# Altium PCB LedDimming_V2_SMD_Only_Horizontal.PcbDoc
Units mm, origin at the board's own origin, x right, y up, seen from the top; angles counter-clockwise.
Board outline 50.04 x 10.16 mm, 2 copper layers (Top Layer, Bottom Layer); 25 components, 20 nets, 63 pads, 14 vias.
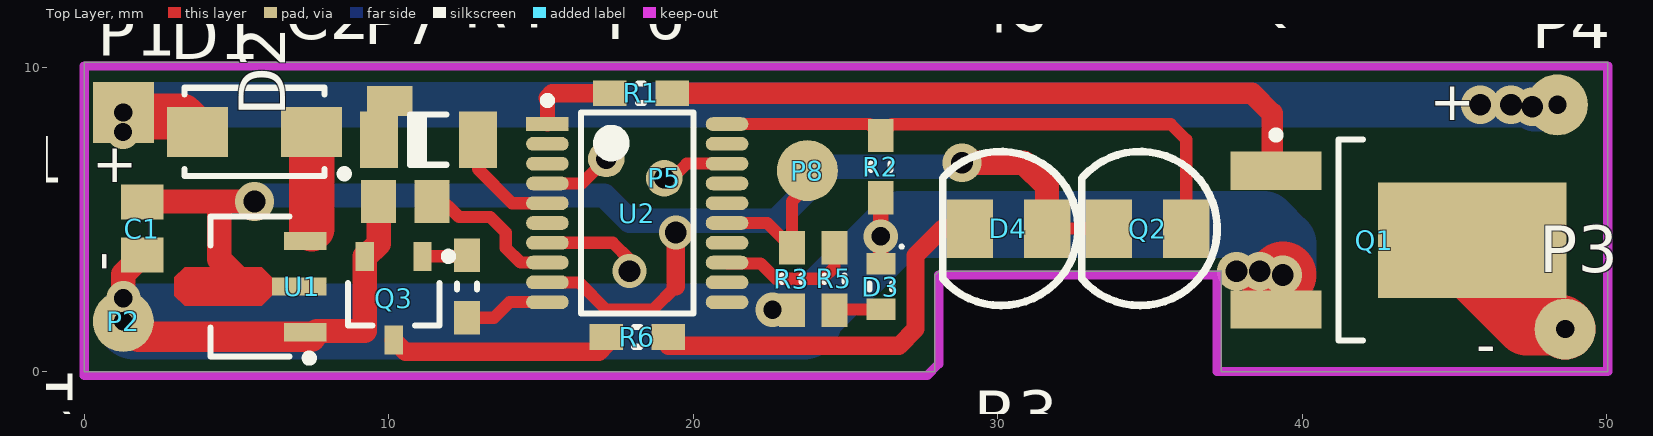
[diagram p0: Top Layer view]
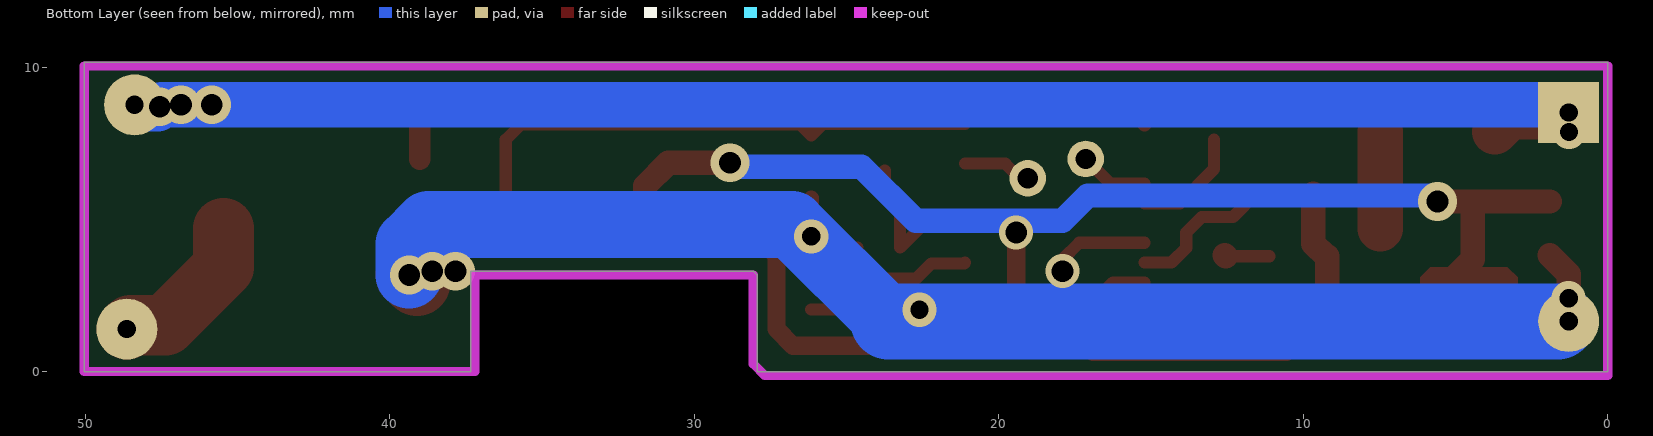
[diagram p1: Bottom Layer view, seen from below]

## Layer stack, top to bottom
Top Solder: solder mask 0.0102, Solder Resist, Dk 3.5
Top Layer: signal copper 0.0356
Dielectric 1: dielectric 0.32, FR-4, Dk 4.8
Bottom Layer: signal copper 0.0356
Bottom Solder: solder mask 0.0102, Solder Resist, Dk 3.5

## Board outline
0,0 27.94,0 27.94,3.175 28.067,3.302 37.338,3.302 37.338,0 50.038,0 50.038,10.16 0,10.16

## Design rules (kind name [scope] priority, off if disabled: settings)
Clearance [All] p1: gap=0.2 ignorepadtopadclearanceinfootprint=FALSE
PolygonConnect [All] p1: connectstyle=Relief reliefconductorwidth=0.254 reliefentries=4 polygonreliefangle="90 Angle" airgapwidth=0.254
RoomDefinition LedDimming [InComponentClass('LedDimming')] p1: confinementstyle=ConfineIn formatcopy=TRUE lockcomponents=FALSE outline -50.8,-76.2 0,-76.2 0,-50.8 -50.8,-50.8
RoutingVias [All] p1: holewidth=0.4 width=8 viastyle="Through Hole" minholewidth=0.711 minwidth=1.27 maxholewidth=0.711 maxwidth=1.27
SolderMaskExpansion [All] p1: expansion=0.102
Width [All] p1: maxlimit=4 minlimit=0.4 preferedwidth=0.5
30 further rules are at their usual default settings.

## Components (designator, comment, footprint, x,y, rotation, side; value= is the part's Value field where it differs from the comment)
C1 "106" CAPC2012X12N 1.905,4.699 r90 top
C2 "104" CAPC2012X12N 10.541,5.588 r0 top
D1 "1N4007" SODFL504X244-2N 5.588,7.874 r180 top
D2 "1N4148" DIOMELF3515N 11.303,7.62 r0 top
D3 "LED0603" DIOC1608X06N 26.162,2.794 r270 top
D4 "LED IR 3mm-SMD" LED_IR_3mm-SMD 31.623,4.699 r180 top
P1 "P" Point#1 1.281,8.509 r0 top
P2 "P" Point#2 1.281,1.651 r0 top
P3 "P" Point#2 48.641,1.397 r0 top
P4 "P" Point#2 48.387,8.763 r0 top
P5 "P" Point#3 19.05,6.35 r0 top
P6 "P" Point#3 17.145,6.985 r0 top
P7 "P" Point#4 10.033,8.89 r0 top
P8 "P" Point#5 23.749,6.604 r0 top
Q1 "AOD424" DPAK228P991X229-3N_TO252 43.243,4.318 r0 top
Q2 "LED IR 3mm-SMD" LED_IR_3mm-SMD 36.195,4.699 r180 top
Q3 "C1815" SOT95P278X125-3N 10.16,2.413 r270 top
R1 "470R" RESC2608X06N_0603 18.288,9.144 r180 top
R2 "10K" RESC2608X06N_0603 26.162,6.731 r90 top
R3 "10K" RESC2608X06N_0603 23.241,3.048 r90 top
R4 "1K" RESC2608X06N_0603 12.573,2.794 r90 top
R5 "1K" RESC2608X06N_0603 24.638,3.048 r90 top
R6 "330R" RESC2608X06N_0603 18.161,1.143 r0 top
U1 "CJA1117B-5.0 SOT89" SOT89-150P409X160-3N 5.461,2.794 r180 top
U2 "STM8S003" TSOP65P640X120-20N 18.161,5.207 r0 top value=STM8S003F3

## Footprints (in the part's own frame and the unit in brackets; to place one, negate y for a bottom-side part, rotate by r counter-clockwise, add the part's x,y. Pads: shape width x height; smd on the part's side, far side on the other; paste and mask are expansions set on the pad)
CAPC2012X12N [mm] "Chip Capacitor, 2-Leads, Body 2.00x1.25mm, IPC Medium Density"
  rect 1.15x1.4 smd: 1(-0.875,0) 2(0.875,0)
  body extent -1.1,-0.67 1.1,0.67, height 1.2
DIOC1608X06N [mm] "Chip Diode, 2-Leads, Body 1.60x0.80mm, IPC Medium Density"
  rect 0.7x0.95 smd: 1(-0.75,0) 2(0.75,0)
  silkscreen extent -1.36,-0.38 0.1,0.74, body extent -0.9,-0.4 0.9,0.4, height 0.6
DIOMELF3515N [mm] "MELF Diode, 2-Leads, Body 3.50x1.55mm, IPC Medium Density"
  rect 1.25x1.85 smd: 1(-1.625,0) 2(1.625,0)
  silkscreen extent -0.6,-0.83 0.6,0.82, body extent -1.85,-0.85 1.85,0.85, height 1.69
DPAK228P991X229-3N_TO252 [mm] "D-PAK, 3-Pads, Body 6.15x6.65mm (max), IPC Medium Density"
  rect 3x1.25 smd: 1(-4.1,2.28) 3(-4.1,-2.28)
  rect 6.2x3.8 smd: 4(2.35,0)
  silkscreen extent -4.22,-3.3 -1.25,3.58, body extent -2.05,-3.3 4.05,3.3, height 2.29
LED_IR_3mm-SMD [mil] "IR Transmitter and Receiver Led"
  rect 60x75.75 smd: 1(100,0) 2(0,0)
  silkscreen extent -40,-100 135,100
Point#1 [mm]
  rect 2x2 hole 0.6: 1(0,0)
Point#2 [mm]
  round 2 hole 0.6: 1(0,0)
Point#3 [mm]
  round 1.2 hole 0.67: 1(0,0)
Point#4 [mm]
  rect 1.5x1 smd: 1(0,0)
Point#5 [mm]
  round 2 smd: 1(0,0)
RESC2608X06N_0603 [mm] "Chip Resistor, 2-Leads, Body 2.60x0.80mm, IPC Medium Density"
  rect 1.1x0.85 smd: 1(-1.025,0) 2(1.025,0)
  silkscreen extent -0.1,-0.33 0.1,0.33, body extent -1.3,-0.4 1.3,0.4, height 0.6
SODFL504X244-2N [mm] "SODFL, 2-Leads, Body 2.70x5.04mm, IPC Medium Density"
  rect 2x1.65 smd: 1(-1.875,0) 2(1.875,0)
  silkscreen extent -3.08,-1.45 2.3,1.5, body extent -2.3,-1.45 2.3,1.45, height 2.44
SOT89-150P409X160-3N [mm] "SOT89, 3-Leads, Body 4.50x2.45mm, Pitch 1.50mm, Lead Span 4.1mm, IPC Medium Density"
  rect 1.4x0.6 smd: 1(-1.8,1.5) 3(-1.8,-1.5)
  rect 1.8x0.6 smd: 2(-1.6,0)
  Top Layer region: -0.7,0.3 -0.365,0.635 2.165,0.635 2.5,0.3 2.5,-0.3 2.165,-0.635 -0.365,-0.635 -0.7,-0.3
  silkscreen extent -2.05,-2.3 1.32,2.47, body extent -1.28,-2.3 1.32,2.3, height 1.6
SOT95P278X125-3N [mm] "SOT23, 3-Leads, Body 2.92x2.78mm, Pitch 0.95mm, IPC Medium Density"
  rect 0.95x0.6 smd: 1(-1.375,0.95) 2(-1.375,-0.95) 3(1.375,0)
  silkscreen extent -1.5,-1.5 0.9,1.93, body extent -0.9,-1.52 0.9,1.52, height 1.25
TSOP65P640X120-20N [mm] "TSOP, 20-Leads, Body 6.50x4.40mm, Pitch 0.65mm, IPC Medium Density"
  rect 1.4x0.45 smd: 1(-2.95,2.925)
  oval 1.4x0.45 smd: 2(-2.95,2.275) 3(-2.95,1.625) 4(-2.95,0.975) 5(-2.95,0.325) 6(-2.95,-0.325) 7(-2.95,-0.975) 8(-2.95,-1.625) 9(-2.95,-2.275) 10(-2.95,-2.925) 11(2.95,-2.925) 12(2.95,-2.275) 13(2.95,-1.625) 14(2.95,-0.975) 15(2.95,-0.325) 16(2.95,0.325) 17(2.95,0.975) 18(2.95,1.625) 19(2.95,2.275) 20(2.95,2.925)
  silkscreen extent -3.07,-3.3 1.85,3.82, body extent -3.2,-3.3 3.2,3.3, height 1.2

## Part data
C1: library part "Capacitor 106"
C2: library part "Capacitor 104 0603"
D1: library part "1N4007_SMD Diode", "1N4007_SMD"
D2: library part 1N4148_SMD, "DIODE GEN PURP 75V 200MA DO213AA", Supplier Part Number 1=1N4148UR-1-ND, Supplier 1=Digi-Key
P1 P2 P3 P4 P5 P6 P7 P8: library part Point
Q1: library part "AOD424 20V N-Channel MOSFET", "AOD424 20V N-Channel MOSFET"
Q3: library part "Transitor C1815 NPN", "SOT-23 Plastic-Encapsulate Transistors"
R1: library part R470_0603_5%, "Thick Film Resistors - SMD 470 ohm 5%", Supplier Part Number 1=CR0603-JW-471ELFCT-ND, Supplier 1=Digi-Key
R2 R3: library part R10k_0603_5%, "RES SMD 10K OHM 1% 1/4W 0603", Supplier Part Number 1=541-10.0KSCT-ND, Supplier 1=Digi-Key
R4 R5: library part 1k_0603_5%, "Thick Film Resistors - SMD 0603 1kOHMS 5% 1/10WATT", Supplier Part Number 1=CR0603-JW-101ELFCT-ND, Supplier 1=Digi-Key
R6: library part R330_0603_5%, "Thick Film Resistors - SMD 330 ohm 5%", Supplier Part Number 1=CR0603-JW-471ELFCT-ND, Supplier 1=Digi-Key
U1: "CJA1117B-5.0 SOT89 Power IC 1A 5V_IC"
U2: "MCU 8-bit STM8S STM8 CISC 8KB Flash 3.3V/5V 20-Pin TSSOP T/R", Supplier Part Number 1=497-18051-1-ND

## Via types
v1: diameter 1.27, hole 0.711, Top Layer to Bottom Layer, 8 vias
v2: diameter 1.12, hole 0.6, Top Layer to Bottom Layer, 4 vias
v3: diameter 1.12, hole 0.711, Top Layer to Bottom Layer, 2 vias

## Nets (pads, with @x,y where several pads share a name; then routed paths per layer and width w, separated by ;. In a path a pad name is that pad's centre, name@x,y a point inside that pad or via, vN(x,y) a via of type N, cw(c..) or ccw(c..) an arc to the next point about the centre after c; other vN are vias at no path point)
D_I: P8.1 R3.2 U2.15 | length 5.2
  Top Layer w0.4: U2.15 22.432,4.882 R3.2 23.241,5.588 23.749,6.096 P8.1
D_O: D2.2 U2.5 | length 3.7
  Top Layer w0.4: D2.2 12.928,6.656 14.052,5.532 U2.5
D_Output: D2.1 P7.1
GND: C1.1 C2.1 D3.1 P2.1 Q1.3 Q3.2 R2.1 R3.1 U1.1 U2.7 | length 61.5
  Top Layer w0.4: U2.7 17.358,4.232 17.907,3.683 v3(17.907,3.302)
  Top Layer w0.5: D3.1 v2(26.162,4.445) R2.1
  Top Layer w0.8: P2.1 v2(1.281,2.413) 1.281,3.2 C1.1 ; U1.1@7.445,1.143 7.638,1.336 9.21,1.336 Q3.2 9.249,3.788 9.666,4.205 C2.1 C2.1@9.666,5.842
  Top Layer w1: P2.1 1.789,1.143 U1.1@7.445,1.143
  Top Layer w2.2: v1@39.116,2.921 v1(39.37,3.175)
  Bottom Layer w2.2: 23.622,1.651 26.797,4.826 38.735,4.826 39.37,4.191 v1(39.37,3.175)
  Bottom Layer w2.5: P2.1@1.651,1.651 23.622,1.651
  other v1: 37.846,3.302 38.608,3.302
  other v2: 22.606,2.032
NetC2_2: C2.2 U2.8 | length 4.9
  Top Layer w0.4: C2.2@11.543,5.842 12.305,5.08 13.335,5.08 13.843,4.572 13.843,4.064 14.325,3.582 U2.8
NetD1_1: D1.1 U1.3 | length 3.2
  Top Layer w1.5: 7.474,4.699 D1.1@7.474,7.874
NetD3_2: D3.2 R5.1 | length 1.5
  Top Layer w0.4: R5.1 24.659,2.044 D3.2
NetD4_1: D4.1 R6.2 | length 12.9
  Top Layer w0.6: R6.2@19.186,0.889 19.186,0.846 23.963,0.846 26.754,0.846 27.305,1.397 27.305,3.81 28.194,4.699 D4.1
NetP3_1: P3.1 Q1.4 | length 5.3
  Top Layer w2: Q1.4@45.466,4.699 45.466,3.429 47.371,1.524 48.514,1.524 P3.1
NetQ1_1: Q1.1 R1.1 | length 21.5
  Top Layer w0.7: R1.1 38.354,9.144 39.016,8.482 Q1.1@39.016,6.979
NetQ2_2: Q2.2 R2.2 U2.20 | length 18.5
  Top Layer w0.4: U2.20 25.786,8.132 R2.2 26.534,8.128 35.687,8.128 36.195,7.62 Q2.2
NetQ3_1: Q3.1 R4.2 | length 1.5
  Top Layer w0.4: Q3.1 R4.2@12.542,3.788
  Top Layer w0.8: R4.2@12.542,3.788 R4.2
NetQ3_3: Q3.3 R6.1 | length 7.2
  Top Layer w0.6: Q3.3 10.548,0.65 16.897,0.65 R6.1@17.136,0.889
NetR1_2: R1.2 U2.1 | length 2.9
  Top Layer w0.5: U2.1 15.211,8.988
  Top Layer w0.6: 15.211,8.988 15.367,9.144 R1.2@17.151,9.144
NetR4_1: R4.1 U2.10 | length 2.9
  Top Layer w0.4: R4.1 13.453,1.769 13.966,2.282 U2.10
NetR5_2: R5.2 U2.13 | length 4.6
  Top Layer w0.4: U2.13 21.136,3.557 22.211,3.557 22.72,3.048 24.257,3.048 24.638,3.429 R5.2
RESET: P6.1 U2.4 | length 2.3
  Top Layer w0.4: U2.4 16.342,6.182 P6.1
SWIM: P5.1 U2.18 | length 2.3
  Top Layer w0.4: P5.1 19.304,6.35 19.786,6.832 U2.18
VCC_5V: C1.2 D4.2 Q2.1 U1.2 U2.9 | length 44.6
  Top Layer w0.4: U2.9 16.245,2.932 17.145,2.032 18.669,2.032 19.431,2.794 ; D4.2 Q2.1
  Top Layer w0.6: 19.431,2.794 v3(19.431,4.572)
  Top Layer w0.8: C1.2@1.905,5.588 4.431,5.588 ; 5.334,2.794 4.431,3.697 4.431,5.588 ; v1(5.588,5.588) 4.431,5.588 ; v1(28.829,6.858) 30.861,6.858 31.623,6.096 D4.2
  Bottom Layer w0.8: v1(5.588,5.588) 5.588,5.728 5.645,5.785 17.075,5.785 17.907,4.953 22.733,4.953 24.511,6.731 28.702,6.731 v1(28.829,6.858)
VCC_12V: D1.2 P1.1 P4.1 | length 50.4
  Top Layer w1.5: P1.1@1.408,8.382 3.205,8.382 D1.2
  Bottom Layer w0.4: P4.1@48.387,8.89 P4.1@48.768,8.509
  Bottom Layer w1.5: P1.1@1.281,8.763 v1(45.847,8.763) v1(46.863,8.763) P4.1@47.498,8.763 ; v1(47.561,8.7) 47.625,8.636 48.387,8.636 P4.1 P4.1@48.387,8.89
  other v2: 1.27,7.874
pads on no net: U2.2 U2.3 U2.6 U2.11 U2.12 U2.14 U2.16 U2.17 U2.19

## Keep-outs
Keep-Out Layer:
  lines w0.3: 0,-0.127 0,10.033 50.038,10.033 50.038,0 40.386,0 37.211,0 37.211,3.175 28.067,3.175 28.067,0.254 27.686,-0.127 25.702,-0.127 24.336,-0.127 20.352,-0.127 18.931,-0.127 16.8,-0.127 14.057,-0.127 12.383,-0.127 0,-0.127

## Silkscreen, mask and mechanical layers (free items; w line width, h text height)
Top Overlay:
  text "+" at 44.196,8.255 h1.3
  text "+" at 0.254,6.223 h1.3
  text "-" at 1.143,3.302 h1.3 r90
  text "-" at 45.72,0.254 h1.3
Bottom Solder:
  lines w1.5: 1.408,1.524 23.241,1.524 24.003,2.286 24.384,2.286 26.924,4.826 38.227,4.826 39.37,3.683 39.37,3.175 ; 1.408,8.636 1.281,8.763 48.768,8.763

## Dimensions
24.336,-0.127 to 25.702,-0.127 on Mechanical 1
0,-0.127 to 0,10.033 on Mechanical 1